# Altium PCB w39_dmx512_master_PCB.PcbDoc
Units mil, origin at the board's own origin, x right, y up, seen from the top; angles counter-clockwise.
Board outline 2360.03 x 1530.03 mil, 2 copper layers (Top Layer, Bottom Layer); 19 components, 14 nets, 82 pads, 0 vias.
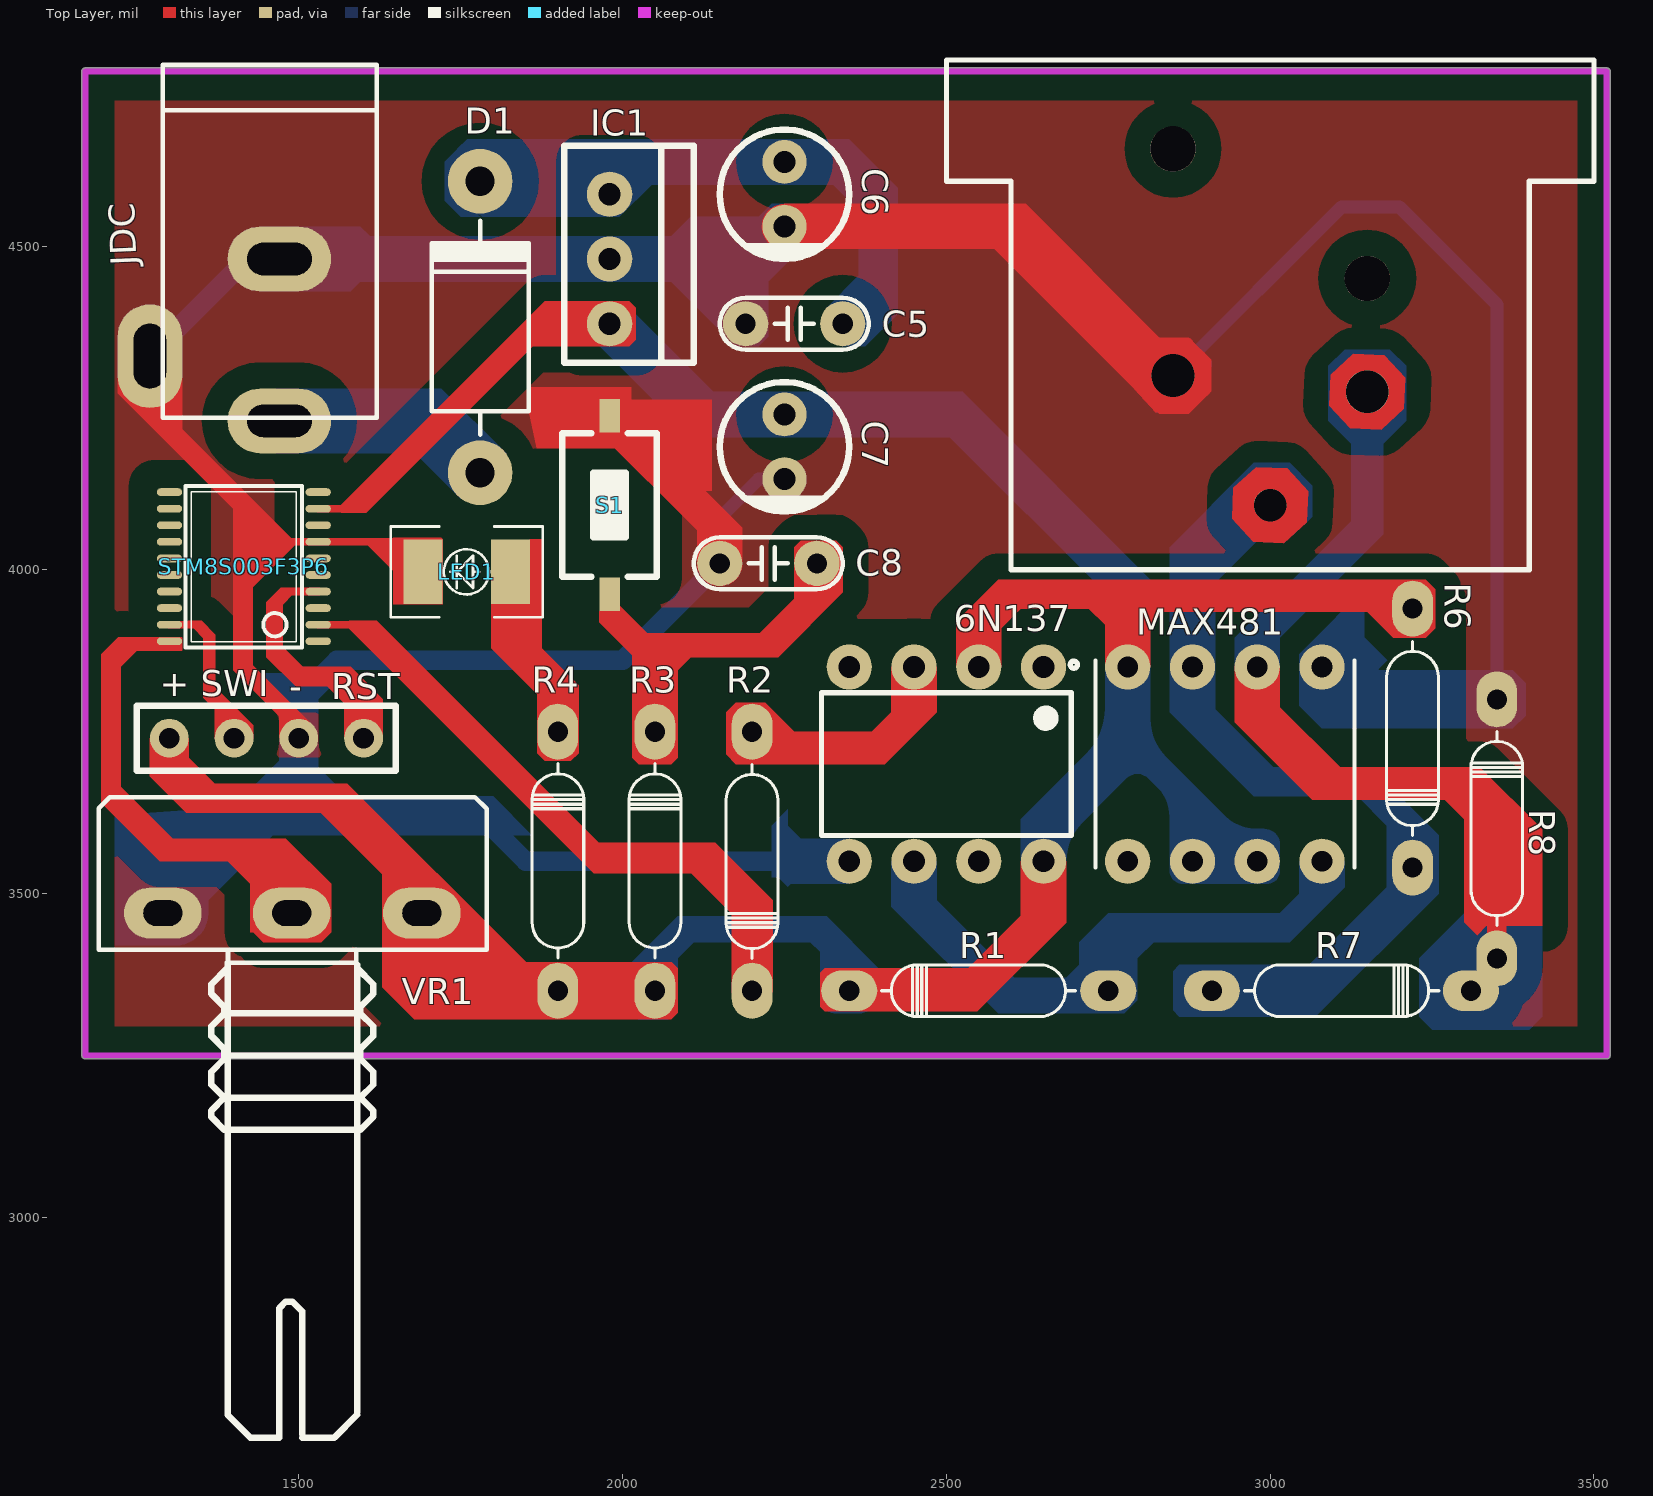
[diagram p0: Top Layer view]
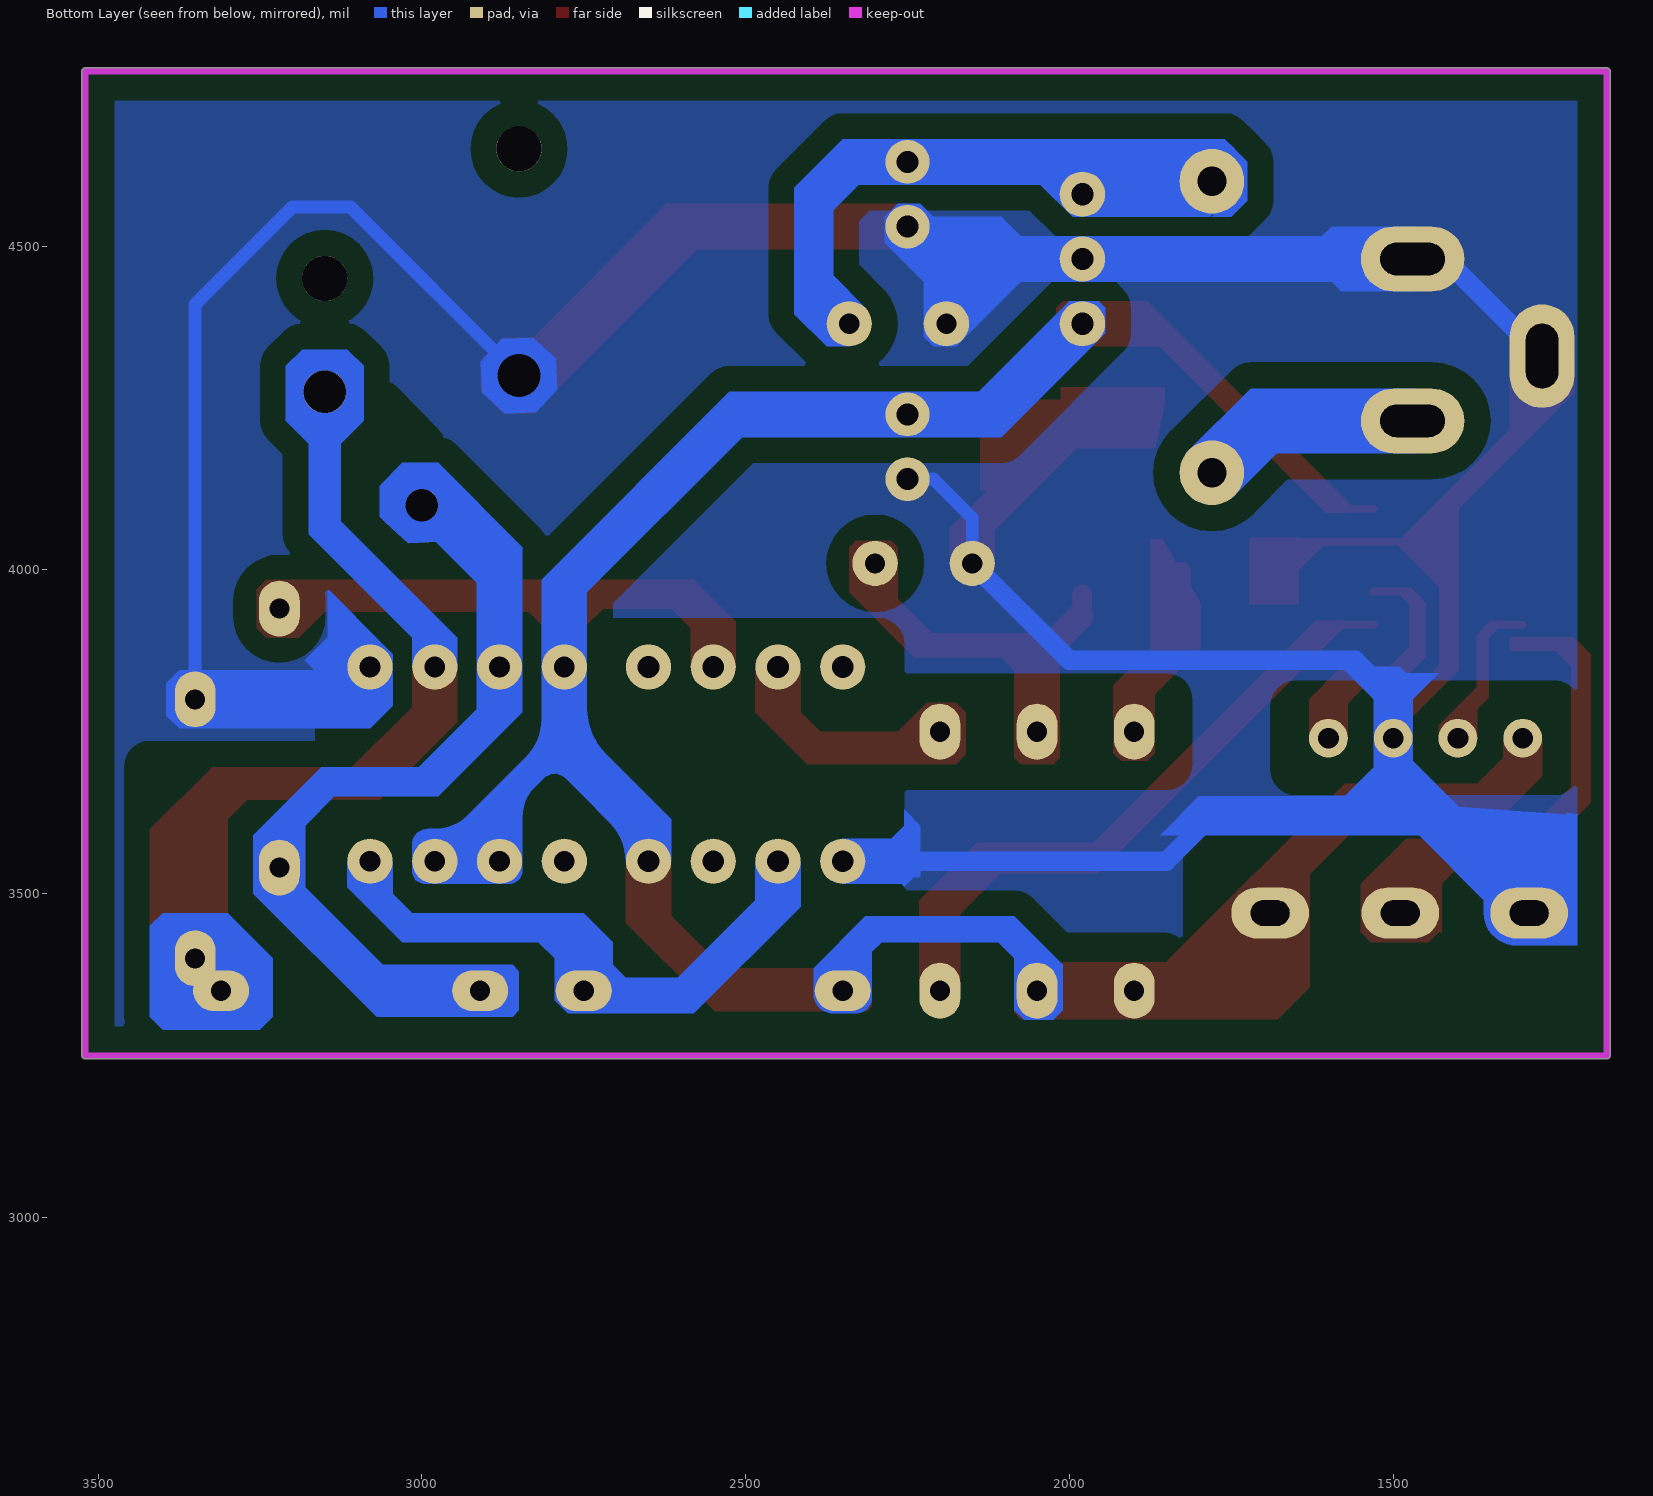
[diagram p1: Bottom Layer view, seen from below]
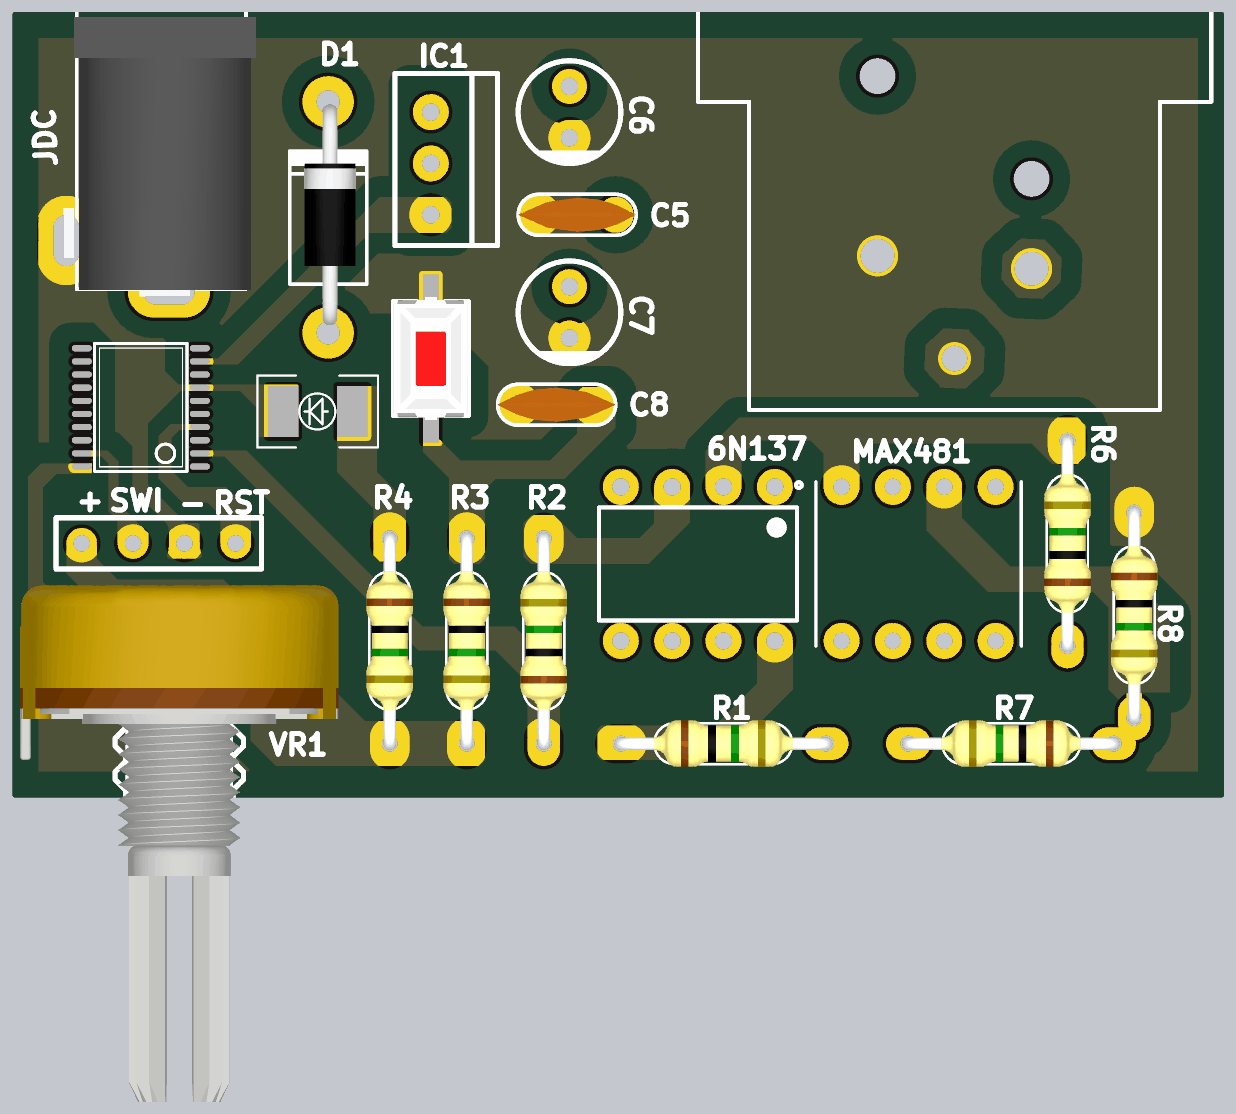
[diagram p2: 3D render of the assembled board from above, using the file's embedded part models]

## Layer stack, top to bottom
Top Solder: solder mask 0.4, Solder Resist, Dk 3.5
Top Layer: signal copper 1.4
Dielectric 1: dielectric 12.6, FR-4, Dk 4.8
Bottom Layer: signal copper 1.4
Bottom Solder: solder mask 0.4, Solder Resist, Dk 3.5

## Board outline
1170,3244.99 cw(c1170,3250) 1164.98,3250 1164.98,4770 cw(c1170,4770) 1170,4775.02 3520,4775.02 cw(c3520,4770) 3525.01,4770 3525.01,3250 cw(c3520,3250) 3520,3244.99

## Design rules (kind name [scope] priority, off if disabled: settings)
Clearance [All] p1: gap=40 ignorepadtopadclearanceinfootprint=FALSE
PlaneConnect [All] p1: planeconnectstyle=Direct reliefexpansion=20 reliefentries=4 reliefconductorwidth=10 reliefairgap=10
PolygonConnect [All] p1: connectstyle=Direct reliefconductorwidth=10 reliefentries=4 polygonreliefangle="90 Angle" airgapwidth=10
RoutingVias [All] p1: holewidth=28 width=50 viastyle="Through Hole" minholewidth=28 minwidth=50 maxholewidth=28 maxwidth=50
SolderMaskExpansion [All] p1: expansion=7
Width [All] p1: maxlimit=30 minlimit=12 preferedwidth=20 minimp=50.000000 maximp=50.000000 favimp=50.000000
29 further rules are at their usual default settings.

## Classes and differential pairs
component class w32_dmx512_Schematic: 6N137 C5 C8 D1 IC1 JDC LED1 MAX481 R1 R2 R3 R4 R6 R7 R8 S1 STM8S003F3P6 VR1

## Components (designator, comment, footprint, x,y, rotation, side; value= is the part's Value field where it differs from the comment)
6N137 "6N137" DIP762W50P254L977H451Q8 2500,3700 r270 top
C5 "" CN150 2265,4380 r0 top
C8 "104" CN150 2225,4010 r180 top
CN1 "NC3FBH1" NC3FBH1 3000,4300 r0 top
D1 "1N4007" D2A 1780,4600 r270 top
IC1 "LM7805" 7805 1980,4480 r270 top
JDC "Jac DC" DC-IN 1370,4355 r270 top
LED1 "LED" LED-RED-0805 1826.93,3996.88 r180 top
MAX481 "MAX481CPA" 21-0043D_8 3080,3850 r90 top
R1 "R0.4W" "DIEN TRO 1/4 W" 2350,3350 r0 top
R2 "R0.4W" "DIEN TRO 1/4 W" 2200,3350 r90 top
R3 "R0.4W" "DIEN TRO 1/4 W" 2050,3750 r270 top
R4 "R0.4W" "DIEN TRO 1/4 W" 1900,3750 r270 top
R6 "R0.4W" "DIEN TRO 1/4 W" 3220,3540 r90 top
R7 "R0.4W" "DIEN TRO 1/4 W" 3310,3350 r180 top
R8 "R0.4W" "DIEN TRO 1/4 W" 3350,3800 r270 top
S1 "SW-SMD" SW-SMD 1980,4100 r90 top
STM8S003F3P6 "STM8S003F3P6" TSSOP20 1415.13,4004.84 r90 top
VR1 "10k" VR-S1 1490,3470 r0 top

## Footprints (in the part's own frame and the unit in brackets; to place one, negate y for a bottom-side part, rotate by r counter-clockwise, add the part's x,y. Pads: shape width x height; smd on the part's side, far side on the other; paste and mask are expansions set on the pad)
21-0043D_8 [mil]
  round 70 hole 32: 1(-300,300) 2(-300,200) 3(-300,100) 4(-300,0) 5(0,0) 6(0,100) 7(0,200) 8(0,300)
  silkscreen extent -310,-50 10,350
7805 [mil]
  round 70 hole 34: 1(-100,0) 2(0,0) 3(100,0)
  silkscreen extent -175,-70 160,130
CN150 [mil]
  round 70 hole 31: 1(-75,0) 2(75,0)
  silkscreen extent -115,-40 115,40, body extent -115,-33 115,33, height 235
D2A [mil] "Diode 2A, W 150mil, L 450mil"
  round 100 hole 45: 1(450,0) 2(0,0)
  silkscreen extent 61,-75 391,75, body extent 5,-47 435,54, height 100
DC-IN [mil] "Jac DC input"
  oval 100x160 hole 50 slot 100 at 90 deg: 1(125,100) 2(-125,100)
  oval 160x100 hole 50 slot 100 at 0 deg: 3(25,-100)
  silkscreen extent -425,-80 120,250, body extent -410,-105 134,269, height 434
"DIEN TRO 1/4 W" [mm]
  oval 2.2x1.6 hole 0.787: 1(0,0) 2(10.16,0)
  silkscreen extent 1.26,-1.02 8.88,1.02, body extent -0.3,-1.16 10.46,1.16, height 2.93
DIP762W50P254L977H451Q8 [mil]
  round 70 hole 33.46: 1(-150,150) 2(-150,50) 3(-150,-50) 4(-150,-150) 5(150,-150) 6(150,-50) 7(150,50) 8(150,150)
  silkscreen extent -159,-193 110,202
LED-RED-0805 [mil]
  rect 60x100 smd: 1(0,0) 2(135,0)
  silkscreen extent -50,-70 185,70, body extent -20,-60 154,60, height 75
NC3FBH1 [mil]
  round 66 hole 66: 1(-150,0) 2(150,-25)
  round 50 hole 50: 3(0,-200)
  round 70 hole 70 unplated: None(-150,350) None(150,150)
  Top Layer region: 208.73,-3.62 176.41,31.64 128.62,33.73 93.36,1.41 91.27,-46.38 123.59,-81.64 171.38,-83.73 206.64,-51.41
  Top Layer region: 58.73,-178.62 26.41,-143.36 -21.38,-141.27 -56.64,-173.59 -58.73,-221.38 -26.41,-256.64 21.38,-258.73 56.64,-226.41
  Top Layer region: -91.27,21.38 -123.59,56.64 -171.38,58.73 -206.64,26.41 -208.73,-21.38 -176.41,-56.64 -128.62,-58.73 -93.36,-26.41
  Bottom Layer region: 208.73,-3.62 176.41,31.64 128.62,33.73 93.36,1.41 91.27,-46.38 123.59,-81.64 171.38,-83.73 206.64,-51.41
  Bottom Layer region: 58.73,-178.62 26.41,-143.36 -21.38,-141.27 -56.64,-173.59 -58.73,-221.38 -26.41,-256.64 21.38,-258.73 56.64,-226.41
  Bottom Layer region: -91.27,21.38 -123.59,56.64 -171.38,58.73 -206.64,26.41 -208.73,-21.38 -176.41,-56.64 -128.62,-58.73 -93.36,-26.41
  Multi-Layer region: 208.73,-3.62 176.41,31.64 128.62,33.73 93.36,1.41 91.27,-46.38 123.59,-81.64 171.38,-83.73 206.64,-51.41
  Multi-Layer region: 58.73,-178.62 26.41,-143.36 -21.38,-141.27 -56.64,-173.59 -58.73,-221.38 -26.41,-256.64 21.38,-258.73 56.64,-226.41
  Multi-Layer region: -91.27,21.38 -123.59,56.64 -171.38,58.73 -206.64,26.41 -208.73,-21.38 -176.41,-56.64 -128.62,-58.73 -93.36,-26.41
  silkscreen extent -500,-300 500,488
SW-SMD [mm] "Switch SMD type"
  rect 1.321x0.8 smd: 1(-3.5,0) 2(3.5,0)
  silkscreen extent -2.82,-1.85 2.82,1.85, body extent -3.05,-1.85 3.05,1.85, height 2.5
TSSOP20 [mil]
  oval 12x39 smd: 1(-115.16,-114.87) 2(-89.57,-114.87) 3(-63.98,-114.87) 4(-38.39,-114.87) 5(-12.8,-114.87) 6(12.79,-114.87) 7(38.39,-114.87) 8(63.98,-114.87) 9(89.57,-114.87) 10(115.16,-114.87) 11(115.16,114.87) 12(89.57,114.87) 13(63.98,114.87) 14(38.39,114.87) 15(12.79,114.87) 16(-12.8,114.87) 17(-38.39,114.87) 18(-63.98,114.87) 19(-89.57,114.87) 20(-115.16,114.87)
  silkscreen extent -125,-90 125,90
VR-S1 [mil]
  oval 120x78.74 hole 40 slot 60 at 0 deg: 1(-200,0) 2(-1,0) 3(200,0)
  silkscreen extent -299,-810 300,179, body extent -310,-818 310,188, height 839

## Part data
6N137: "High CMR, High Speed TTL Compatible Optocouplers"
C5 C8: library part CN1.5, "Capacitor Ceramic"
CN1: "XLR Receptacle; Female; Gold; Horizontal PCB Mount; 0.996 in.; Ground"
D1: library part D1A, "Diode 1A"
JDC: library part DCIN, "Jac DC input"
LED1: library part "LED SMD"
MAX481: "Single Transmitter/Receiver RS-422/RS-485 8-Pin PDIP N"
R1 R2 R3 R4 R6 R7 R8: library part "Res 1/4 W", "Resistor"
S1: "Switch"
STM8S003F3P6: "Mainstream Value line 8-bit MCU with 8 Kbytes Flash, 16 MHz CPU, integrated EEPROM"
VR1: library part VR-S, "Var Resistor"

## Free pads (board coordinates)
  round 68 hole 34: 2(2250,4140) 2(2250,4240) 2(2250,4530) 2(2250,4630)
  round 60 hole 32: 3(1300,3740) 3(1400,3740) 3(1500,3740) 3(1600,3740)

## Nets (pads, with @x,y where several pads share a name; then routed paths per layer and width w, separated by ;. In a path a pad name is that pad's centre, name@x,y a point inside that pad or via, vN(x,y) a via of type N, cw(c..) or ccw(c..) an arc to the next point about the centre after c; other vN are vias at no path point)
ADC_IN4: STM8S003F3P6.20 VR1.2 | length 662.2
  Top Layer w12: STM8S003F3P6.20 1249.68,3889.68 1207.12,3847.12 1207.12,3653.58 1300.14,3560.56 1398.44,3560.56 VR1.2
GND: 6N137.5 C5.1 C8.2 CN1.1 IC1.2 JDC.2 JDC.3 LED1.2 MAX481.5 pad.2@2250,4140 pad.2@2250,4530 pad.3@1500,3740 R8.1 S1.2 STM8S003F3P6.7 VR1.1 | length 7016.1
  Top Layer w12: JDC.3 1270,4250 1476.77,4043.23 ; pad.3@1500,3740 1500,3761.26 1410.8,3850.46 1410.8,3977.25 1476.77,4043.23 ; LED1.2 1645.59,4043.23 STM8S003F3P6.7 1476.77,4043.23
  Top Layer w30: S1.2 2150,4067.8 C8.2 ; pad.2@2250,4530 2620,4530 CN1.1
  Bottom Layer w20: C8.2 2150,4080 2210,4140 pad.2@2250,4140 ; CN1.1 3110,4560 3200,4560 3350,4410 R8.1
  Bottom Layer w30: JDC.3 1420,4480 JDC.2 IC1.2 2070,4480 ; VR1.1 1500,3680 ; C8.2 2000.14,3860.14 1558.66,3860.14 1500,3801.48 1500,3740 1500,3680 ; C5.1 2090,4480 2070,4480 ; pad.2@2250,4530 2120,4530 2070,4480 ; 6N137.5 1850.54,3550 1794.14,3606.4 1573.6,3606.4 1500,3680 ; MAX481.5 3130,3800 R8.1
Net6N137_3: 6N137.3 R2.2 | length 357.3
  Top Layer w30: R2.2 2230,3720 2390,3720 2450,3780 6N137.3
Net6N137_6: 6N137.6 MAX481.4 R1.2 | length 883.6
  Bottom Layer w30: 6N137.6 2450,3480 2580,3350 R1.2 2750,3380 2810,3440 3020,3440 3080,3500 MAX481.4
NetC5_2: C5.2 D1.2 IC1.1 pad.2@2250,4630 | length 874.6
  Bottom Layer w20: D1.2 1960,4600 IC1.1
  Bottom Layer w30: IC1.1 2030,4630 2250,4630 2330,4630 2390,4570 2390,4430 C5.2
NetC8_1: C8.1 R3.1 S1.1 | length 603.8
  Top Layer w30: S1.1 1980,3930 2050,3860 ; R3.1 2050,3860 ; C8.1 2300,3963.13 2219.07,3882.2 2050,3882.2 2050,3860
  Bottom Layer w30: R3.1 R3.1@2050,3760
NetCN1_2: CN1.2 MAX481.6 R7.1 R8.2 | length 1221.7
  Top Layer w30: MAX481.6 2980,3770 3080,3670 3290,3670 3350,3610 R8.2
  Bottom Layer w30: MAX481.6 2980,3890 3150,4060 CN1.2
NetCN1_3: CN1.3 MAX481.7 R6.1 R7.2 | length 1250.5
  Bottom Layer w30: R7.2 3060,3350 3220,3510 R6.1 3220,3600 3150,3670 2990,3670 2880,3780 MAX481.7 2880,3980 CN1.3
NetD1_1: D1.1 JDC.1 | length 343.1
  Bottom Layer w30: JDC.1 1700,4230 D1.1
NetLED1_1: LED1.1 R4.1 | length 227.1
  Top Layer w30: LED1.1 1826.93,3873.07 1900,3800
NRST: pad.3@1600,3740 STM8S003F3P6.4 | length 377
  Top Layer w12: STM8S003F3P6.4 1486.46,3966.46 1459.35,3939.35 1459.35,3870.65 1502.72,3827.28 1566.84,3827.28 1600,3794.12 pad.3@1600,3740
PD2: pad.3@1400,3740 STM8S003F3P6.19 | length 239.9
  Top Layer w12: STM8S003F3P6.19 1340,3915.27 1359.07,3896.2 1359.07,3813.81 1400,3772.88 pad.3@1400,3740
PD5: R2.1 STM8S003F3P6.2 | length 924.4
  Top Layer w12: STM8S003F3P6.2 1580.72,3915.27 1945.99,3550 2120,3550 2200,3470 2200,3400
VCC: 6N137.2 6N137.8 IC1.3 MAX481.2 MAX481.3 MAX481.8 pad.2@2250,4240 pad.3@1300,3740 R1.1 R3.2 R4.2 R6.2 STM8S003F3P6.9 VR1.3 | length 5092.2
  Top Layer w12: STM8S003F3P6.9 1574.41,4094.41 1860,4380 IC1.3
  Top Layer w30: pad.3@1300,3740 1300,3700.58 1353.82,3646.76 1569.3,3646.76 1690,3526.06 VR1.3 1700,3460 1700,3400 1750,3350 R4.2 R3.2 ; R1.1 2520,3350 2650,3480 6N137.8 ; 6N137.2 2550,3910 2600,3960 2820,3960 ; MAX481.8 2780,3920 2820,3960 ; R6.2 3200,3960 2820,3960
  Bottom Layer w30: IC1.3@1990,4390 IC1.3 2120,4240 2250,4240 2510,4240 2780,3970 MAX481.8 2780,3740 2795,3725 ; R3.2 2050,3400 2095,3445 2295,3445 2350,3390 R1.1 ; 6N137.8 2650,3580 2795,3725 ; MAX481.3 MAX481.2 2880,3640 2795,3725
pads on no net: 6N137.1 6N137.4 6N137.7 CN1.None MAX481.1 STM8S003F3P6.1 STM8S003F3P6.3 STM8S003F3P6.5 STM8S003F3P6.6 STM8S003F3P6.8 STM8S003F3P6.10 STM8S003F3P6.11 STM8S003F3P6.12 STM8S003F3P6.13 STM8S003F3P6.14 STM8S003F3P6.15 STM8S003F3P6.16 STM8S003F3P6.17 STM8S003F3P6.18

## Polygon pours and split planes (outlines as drawn)
GND on Bottom Layer "Bottom Layer-GND" (solid, remove dead copper, pour order 10): 1170,4770 1170,3250 3520,3250 3520,4770
no net on Bottom Layer "NONET_L02_P002" (solid, remove dead copper, pour order 2): 1180,4625
no net on Bottom Layer "NONET_L02_P004" (solid, remove dead copper, pour order 4): 845,1935
no net on Multi-Layer "NONET_L-01_P-001" (solid, remove dead copper): 1175,4675
GND on Top Layer "Top Layer-GND" (solid, remove dead copper, pour order 12): 1170,4770 1170,3250 3520,3250 3520,4770

## Keep-outs
Keep-Out Layer:
  lines w10: 1170,3250 1170,4770 3520,4770 3520,3250 1170,3250

## Other copper
Top Layer:
  region net GND: 1964.26,4211.82 2115,4061.08 2115,4010 ccw(c2150,4010) 2150,3975 ccw(c2150,4010) 2185,4010 2185,4065 1995,4255
  region net GND: 2250,4495 2574.89,4495 2828.62,4241.27 2874.33,4241.27 2908.73,4275.67 2908.73,4324.33 2874.33,4358.73 2828.62,4358.73 2622.35,4565 2250,4565 ccw(c2250,4530) 2215,4530 ccw(c2250,4530)
  region net GND: 1867.37,4188.08 2013.55,4188.08 2013.55,4281.77 1852.48,4281.77 1852.48,4256.63
  region net GND: 1977.52,4249.65 1977.52,4262.83 2137.34,4262.83 2137.34,4121.95 2119.23,4121.95
  region net PD5: 1808.54,3733.24 1964.42,3577.35 1964.42,3563.01 1934.03,3563.01 1596.52,3900.53 1596.52,3921.28
  region: 1596.46,3921.28 1620.49,3921.28 1808.54,3733.24
  region net PD5: 1577.88,3921.28 1596.52,3921.28 1939.99,3577.81 1940.58,3578.4 2142.95,3578.4 2231.52,3489.82 2231.52,3347.3 2168.53,3347.3 2168.53,3469.2 2106.34,3531.4 1955.54,3531.4 1574.27,3912.66
  region net NRST: 1491,3962 1475,3946 1475,3881 1506,3850 1580,3850 1630,3800 1630,3739 1570,3739 1570,3794 1544,3820 1495,3820 1450,3865 1450,3950 1472.46,3972.46 1486.41,3972.46
  region net GND: 1399,3995 1399,4112 1465,4046 1466,4046
  region net GND: 1482,4026 1499,4043 1469,4043 1466,4046
  region net GND: 1320,4328 1320,4217 1489,4048 1475,4034 1459,4034 1220,4273 1220,4330
  region net GND: 1470,3741 1470,3774 1399,3845 1399,3995 1459,4055 1482,4032 1482,4026 1429,3973 1429,3853 1518,3764 1505,3751 1505,3723
  region: 1470,3741
  region net PD2: 1370,3782.39 1370,3795.43 1378.45,3786.99 1378.45,3780.84 1379.18,3780.11
  region net PD2: 1340.32,3921.27 1349.73,3921.27 1350,3921 1350,3919.91 1345.37,3915.27 1340,3915.27
  region net PD2: 1352.34,3895.34 1352.34,3802.67 1371.31,3783.7 1370,3782.39 1370,3740 1430,3740 1430,3760 1371.31,3818.69 1371.31,3899.69 1350,3921 1329,3921
  region net PD2: 1353.57,3893.78
  region net PD2: 1350.78,3896.07
  region net VCC: 2685,3550 2685,3455 2548,3318 2312,3318 2305,3325 2305,3378 2312,3385 2534,3385 2615,3466 2615,3550
  region net NetCN1_2: 2945,3850 2945,3765 3065,3645 3270,3645 3300,3615 3300,3456 3320,3436 3334,3450 3420,3450 3420,3599 3324,3695 3108,3695 3015,3788 3015,3850
  region net ADC_IN4: 1319,3896 1320,3895 1320,3876 1319,3875 1250,3875 1225,3850 1225,3665 1305,3585 1480,3585 1550,3515 1550,3440 1535,3425 1445,3425 1430,3440 1425,3440 1425,3515 1390,3550 1285,3550 1195,3640 1195,3870 1221,3896
  region net VCC: 2076,3394 2085,3385 2085,3316 2075,3306 1678,3306 1629,3355 1629,3530 1534,3625 1326,3625 1270,3681 1270,3740 1330,3740 1330,3710 1370,3670 1575,3670 1851,3394
  region net VCC: 1565,4100 1880,4415 2010,4415 2020,4405 2020,4355 2010,4345 1861,4345 1604.42,4088.42 1565.64,4088.42
  region net NetLED1_1: 1856.88,4046.87 1874.85,4046.87 1874.85,3878.93 1932,3821.78 1932,3717 1920,3705 1880,3705 1868,3717 1868,3808 1797,3879 1797,3948
  region net GND: 1645.76,4049.21 1719.72,4049.21 1721.96,4046.97 1721.96,3946.86 1645.77,3946.86 1645.77,3998.73 1605.18,4039.32
  region net VCC: 2585,3910 2615,3940 2720,3940 2745,3915 2745,3850 2815,3850 2815,3915 2835,3935 3150,3935 3190,3895 3240,3895 3255,3910 3255,3970 3240,3985 2580,3985 2515,3920 2515,3850 2585,3850
  region net Net6N137_3: 2415,3850 2415,3780 2385,3750 2265,3750 2220,3795 2175,3795 2160,3780 2160,3715 2175,3700 2405,3700 2485,3780 2485,3850
  region net NetC8_1: 1995.53,3944.34 2038.13,3901.73 2211.5,3901.73 2265,3955.23 2265,4035 2275,4045 2330,4045 2340,4035 2340,3965 2240,3865 2105,3865 2085,3845 2085,3710 2075,3700 2025,3700 2015,3710 2015,3868.43 1964.26,3919.17 1964.26,3936.22
  region: 1995.74,3936.41
  region: 1964.26,3936.22
Bottom Layer:
  region net GND: 1310,3420 ccw(c1310,3470) 1360,3470 1360,3490 1460,3590 1860,3590 1800,3650 1550,3650 1530,3670 1530,3800 1580,3850 1490,3850 1470,3830 1470,3705 1280,3515 1270,3515 ccw(c1270,3465) 1220,3465 ccw(c1265,3465) 1265,3420
  region net VCC: 2305,3350 2305,3340 ccw(c2330,3340) 2330,3315 2365,3315 ccw(c2365,3345) 2395,3345 ccw(c2390,3345) 2390,3350
  region net VCC: 2745,3802.5 2745,3786.42 cw(c2645,3786.42) 2715.71,3715.71 2700,3700 cw(c2760.36,3639.64) 2760.36,3725 2795,3725
  region net VCC: 2685,3550 cw(c2769.5,3550) 2709.75,3609.75 2715,3615 cw(c2666.72,3663.28) 2666.72,3595 2655,3595
  region net VCC: 2875,3515 2865,3515 cw(c2865,3535) 2845,3535 ccw(c2847.5,3537.5) 2850,3535 2925,3530
  region net VCC: 3015,3576 ccw(c2991,3576) 2991,3600 2974.94,3600
  region net VCC: 3015,3535 cw(c2995,3535) 2995,3515 cw(c2995,3520) 2990,3520 2990,3545
  region net VCC: 2980,3600 2978.28,3600 cw(c2978.28,3668.28) 2930,3620 ccw(c2978.28,3620) 2944.14,3585.86 2945,3585
  region net VCC: 2815,3775 2815,3770.36 ccw(c2900.36,3770.36) 2840,3710 ccw(c2827.93,3697.93) 2827.93,3715 2805,3715
  region net VCC: 2825,3665 2825.91,3664.09 cw(c2779.82,3618) 2845,3618 2852.98,3625.98 ccw(c2823.96,3655) 2865,3655
  region net VCC: 2845,3645 2845,3591 2845,3535 2865,3515 2995,3515 3015,3535 3015,3576 2991,3600 2950,3600 2815,3735 2815,3860 ccw(c2780,3860) 2780,3895 ccw(c2780,3860) 2745,3860 2745,3745 2615,3615 2615,3550 2685,3550 2685,3585 2777.93,3677.93 cw(c2795,3660.86) 2795,3685 cw(c2795,3660.86) 2812.07,3677.93
  region: 2075,4665 1760,4665 1745,4650 1790,4605 2025,4605 2050,4630
  region net NetC5_2: 2085,4660
  region net NetC5_2: 2085,4660
  region net GND: 1530,3695 1585,3640 1585,3635 1505,3635 1485,3655 1485,3660
  region net GND: 1470,3800 1430,3840 1495,3840 1505,3850
  region net GND: 2350,3515 2260.05,3515 2255.4,3510.35 2240.74,3525 2230,3525 2230,3605 2255,3630 2255,3605 2275,3585 2350,3585
  region net GND: 1230,3625 1215.39,3622.35 1215.39,3621.35 1255,3610
  region net GND: 1215.39,3621.35 1215.39,3420 1287.5,3420 1410,3635
  region net GND: 3060,3885 3143.32,3968.32 3145.38,3968.32 3145.38,3895.62 3181,3860 3155,3834 3137,3834
  region: 2080,3745
  region net GND: 1465,4530 1595,4530 1610,4515 1985,4515 1985,4450 1980,4445 1595,4445 1580,4430 1470,4430
  region net GND: 1980,4445 2075,4445 2175,4345 2210,4345 2225,4360 2225,4445 2285,4505 2285,4545 2265,4565 2230,4565 2210,4545 2105,4545 2075,4515 1985,4515
  region net NetC5_2: 2315,4405 2365,4455 2365,4555 2325,4595 2250,4595 2250,4665 2350,4665 2425,4590 2425,4395 2375,4345 2340,4345
  region net NetC5_2: 2250,4595 2045,4595 1995,4545 1965,4545 1965,4610 1970,4615 1990,4615 2040,4665 2250,4665
  region net NetC5_2: 1775,4550 1780,4545 1980,4545 1980,4615 1890,4615 1850,4655 1750,4655 1725,4630 1725,4570 1750,4545 1785,4545
  region net NetD1_1: 1680,4180 1750,4110 1820,4180 1720,4280 1465,4280 1465,4180
  region net VCC: 2000,4415 2140,4275 2250,4275 2295,4230 2295,4205 2105,4205 1945,4365 1945,4405 1955,4415
  region: 1410,3800
  region net VCC: 2305,3350 2305,3410 2290,3425 2110,3425 2085,3400 2085,3320 2070,3305 2025,3305 2010,3320 2010,3390 2085,3465 2315,3465 2395,3385 2395,3343.52
  region net NetCN1_2: 3125,4195 3090,4230 3090,4315 3115,4340 3185,4340 3210,4315 3210,4230 3170,4190
  region net NetCN1_2: 2945,3850 2945,3895 3125,4075 3125,4240 3160,4240 3175,4225 3175,4055 3015,3895 3015,3850
  region net NetCN1_3: 3065,4130 3065,4081.94 3056.64,4073.59 3055.23,4075 2970,4075
  region: 3065,4125
  region net NetCN1_3: 2845,3850 2845,4035 2975,4165 3030,4165 3065,4130 2915,3980 2915,3850
  region net GND: 3045,3790 3080,3755 3375,3755 3395,3775 3395,3825 3375,3845 3150,3845 3110,3885 3060,3885 3045,3870
  region net NetCN1_3: 3260,3590 3155,3695 3005,3695 2915,3785 2915,3850 2845,3850 2845,3780 2975,3650 3135,3650 3180,3605 3180,3560
  region net VCC: 2250,4205 2505,4205 2745,3965 2745,3850 2815,3850 2815,3985 2525,4275 2250,4275
  region net VCC: 2685,3567.5
  region net Net6N137_6: 2775,3315 2795,3335 2795,3400 2820,3425 3030,3425 3115,3510 3115,3550 3045,3550 3045,3500 3015,3470 2750,3470 2705,3425 2705,3390 2685,3370 2605,3370 2485,3490 2485,3550 2415,3550 2415,3480 2580,3315
  region: 3060,3390 3180,3510 3180,3580 3200,3600 3250,3600 3260,3590 3260,3500 3070,3310 2860,3310 2850,3320 2850,3380 2860,3390
  region net NetCN1_2: 3400,3470 3420,3450 3420,3310 3400,3290 3250,3290 3230,3310 3230,3400 3300,3470

## Silkscreen, mask and mechanical layers (free items; w line width, h text height)
Top Overlay:
  circle w10: c2250,4190 r100
  circle w10: c2250,4580 r100
  lines w10: 2190,4110 2307,4110 ; 2190,4500 2307,4500 ; 2207,4100 2293,4100 ; 2207,4490 2293,4490 ; 1250,3690 1250,3790 1650,3790 1650,3690 1250,3690
  text "C6" at 2370,4620 h40 r270
  text "C7" at 2370,4230 h40 r270
  text "+" at 1285,3805 h40
  text "SWI" at 1348.23,3804.54 h40
  text "-" at 1485,3800 h40
  text "RST" at 1550,3800 h40
Mechanical 1:
  region: 2250,4565
Drill Drawing:
  region: 3400,3470 3420,3450 3420,3310 3400,3290 3250,3290 3230,3310 3230,3400 3300,3470

## Text inside footprints (layer, text, board x,y; h text height)
CN1: Mechanical 1 "2" at 3050.14,4290.16 h40; Mechanical 1 "3" at 2899.79,4114.79 h40; Mechanical 1 "1" at 2749.87,4315.17 h40